# Altium PCB PCB.pcbdoc
Units mm, origin at the board's own origin, x right, y up, seen from the top; angles counter-clockwise.
Board outline 81.6 x 72.96 mm, 4 copper layers (Top Layer, Layer 1, Layer 2, Bottom Layer), stack 0.603 mm thick; 45 components, 81 nets, 314 pads, 97 vias.
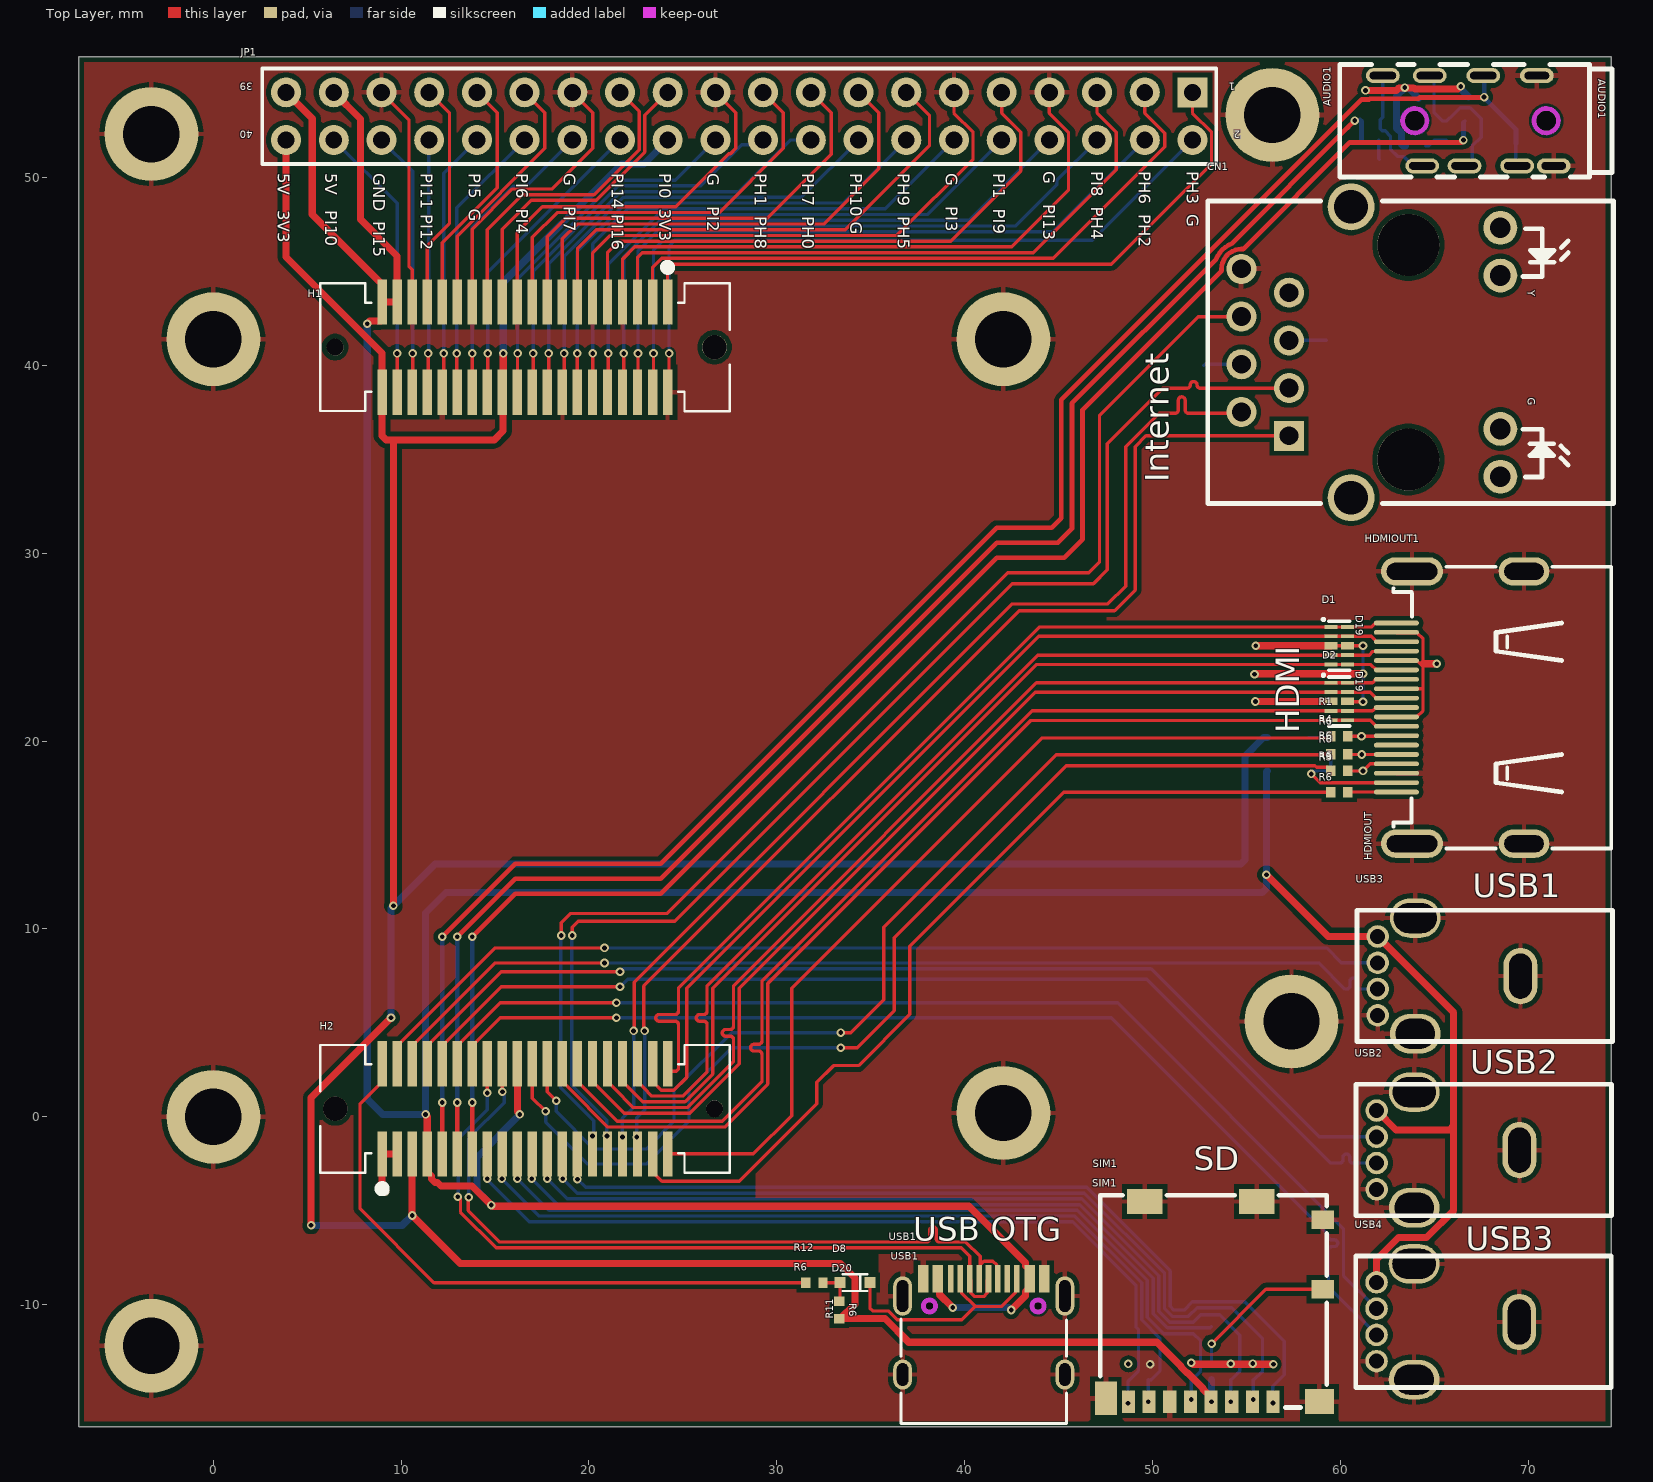
[diagram p0: Top Layer view]
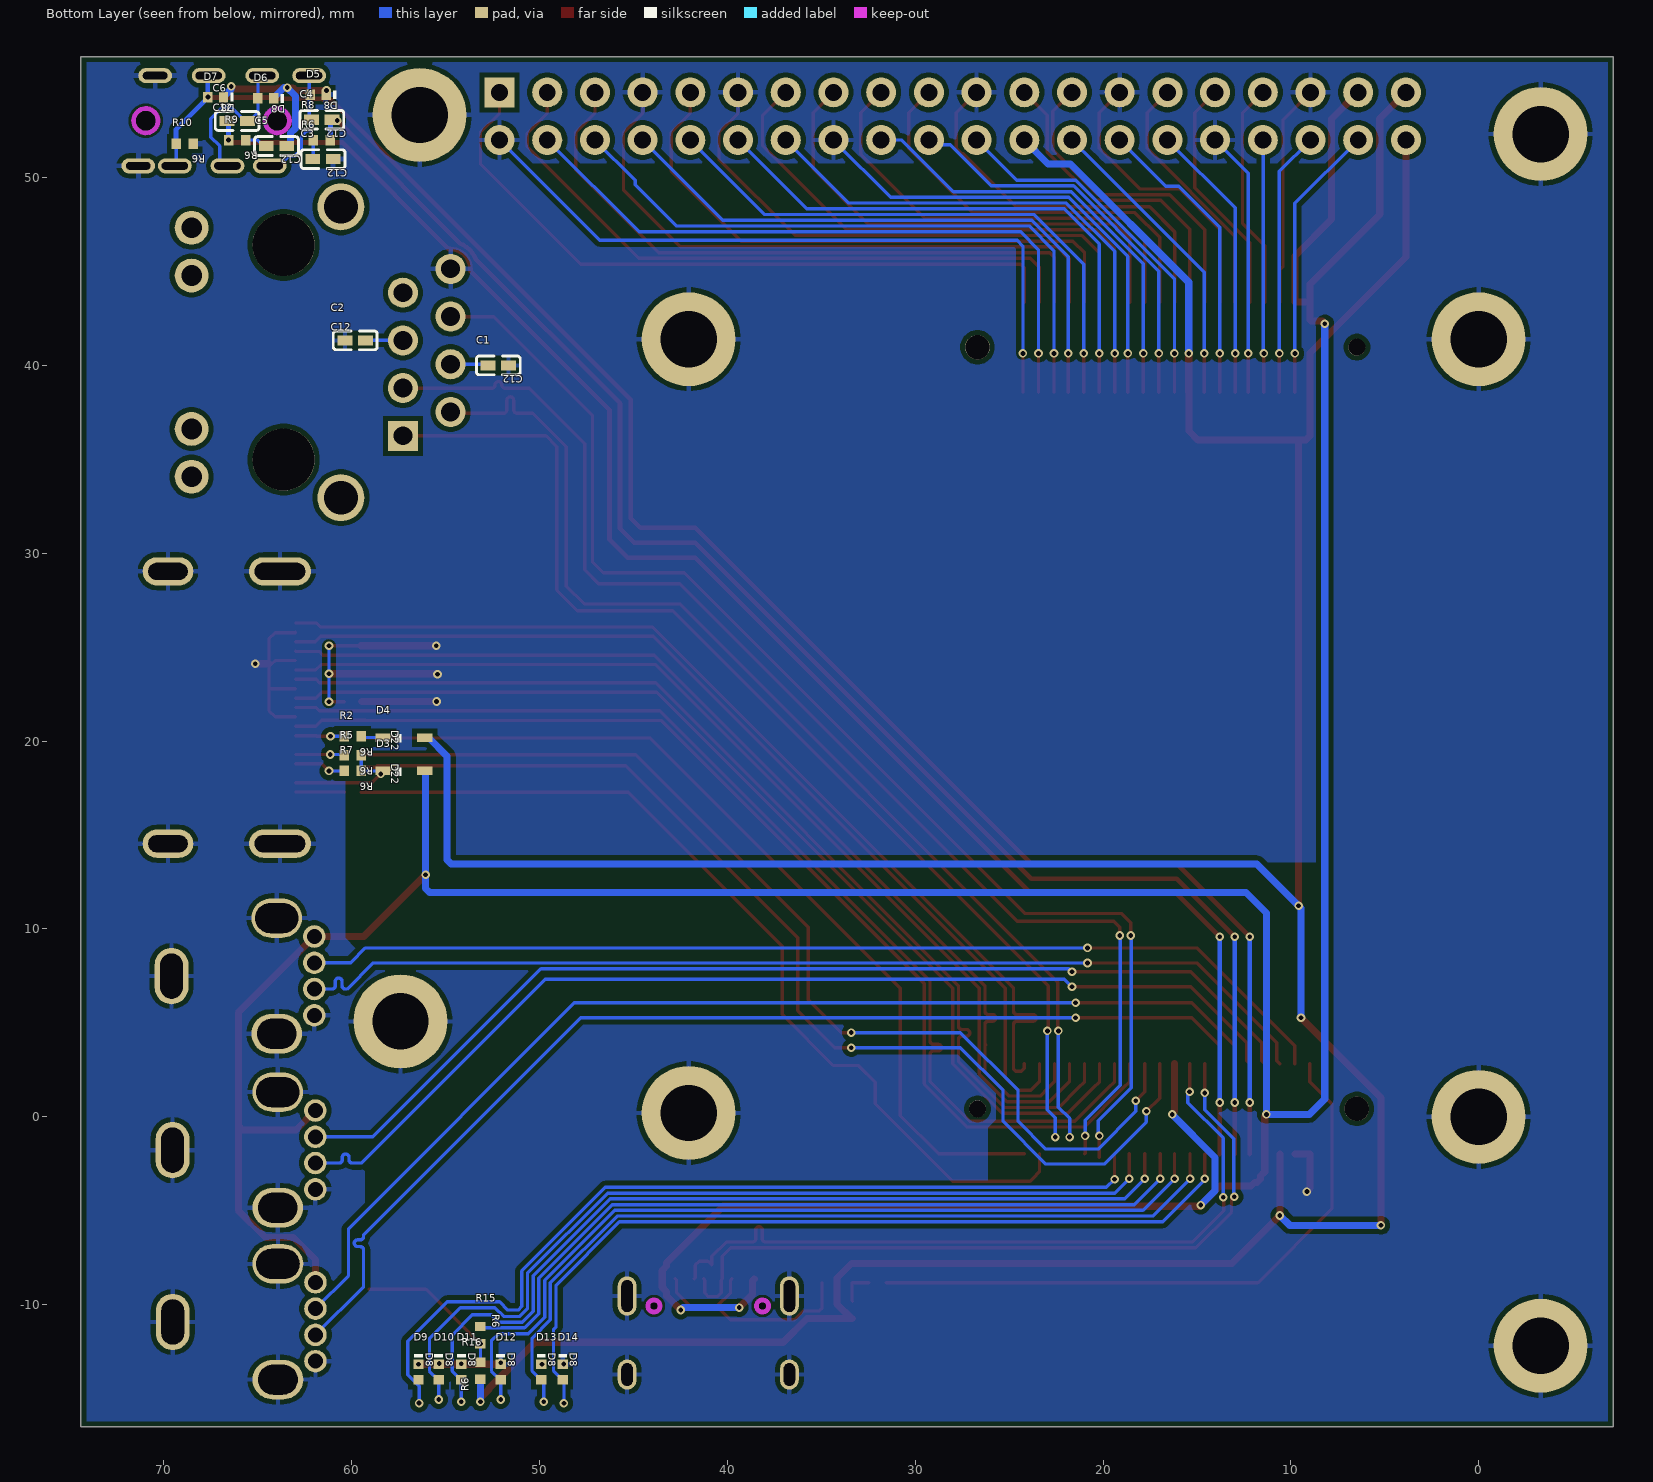
[diagram p1: Bottom Layer view, seen from below]
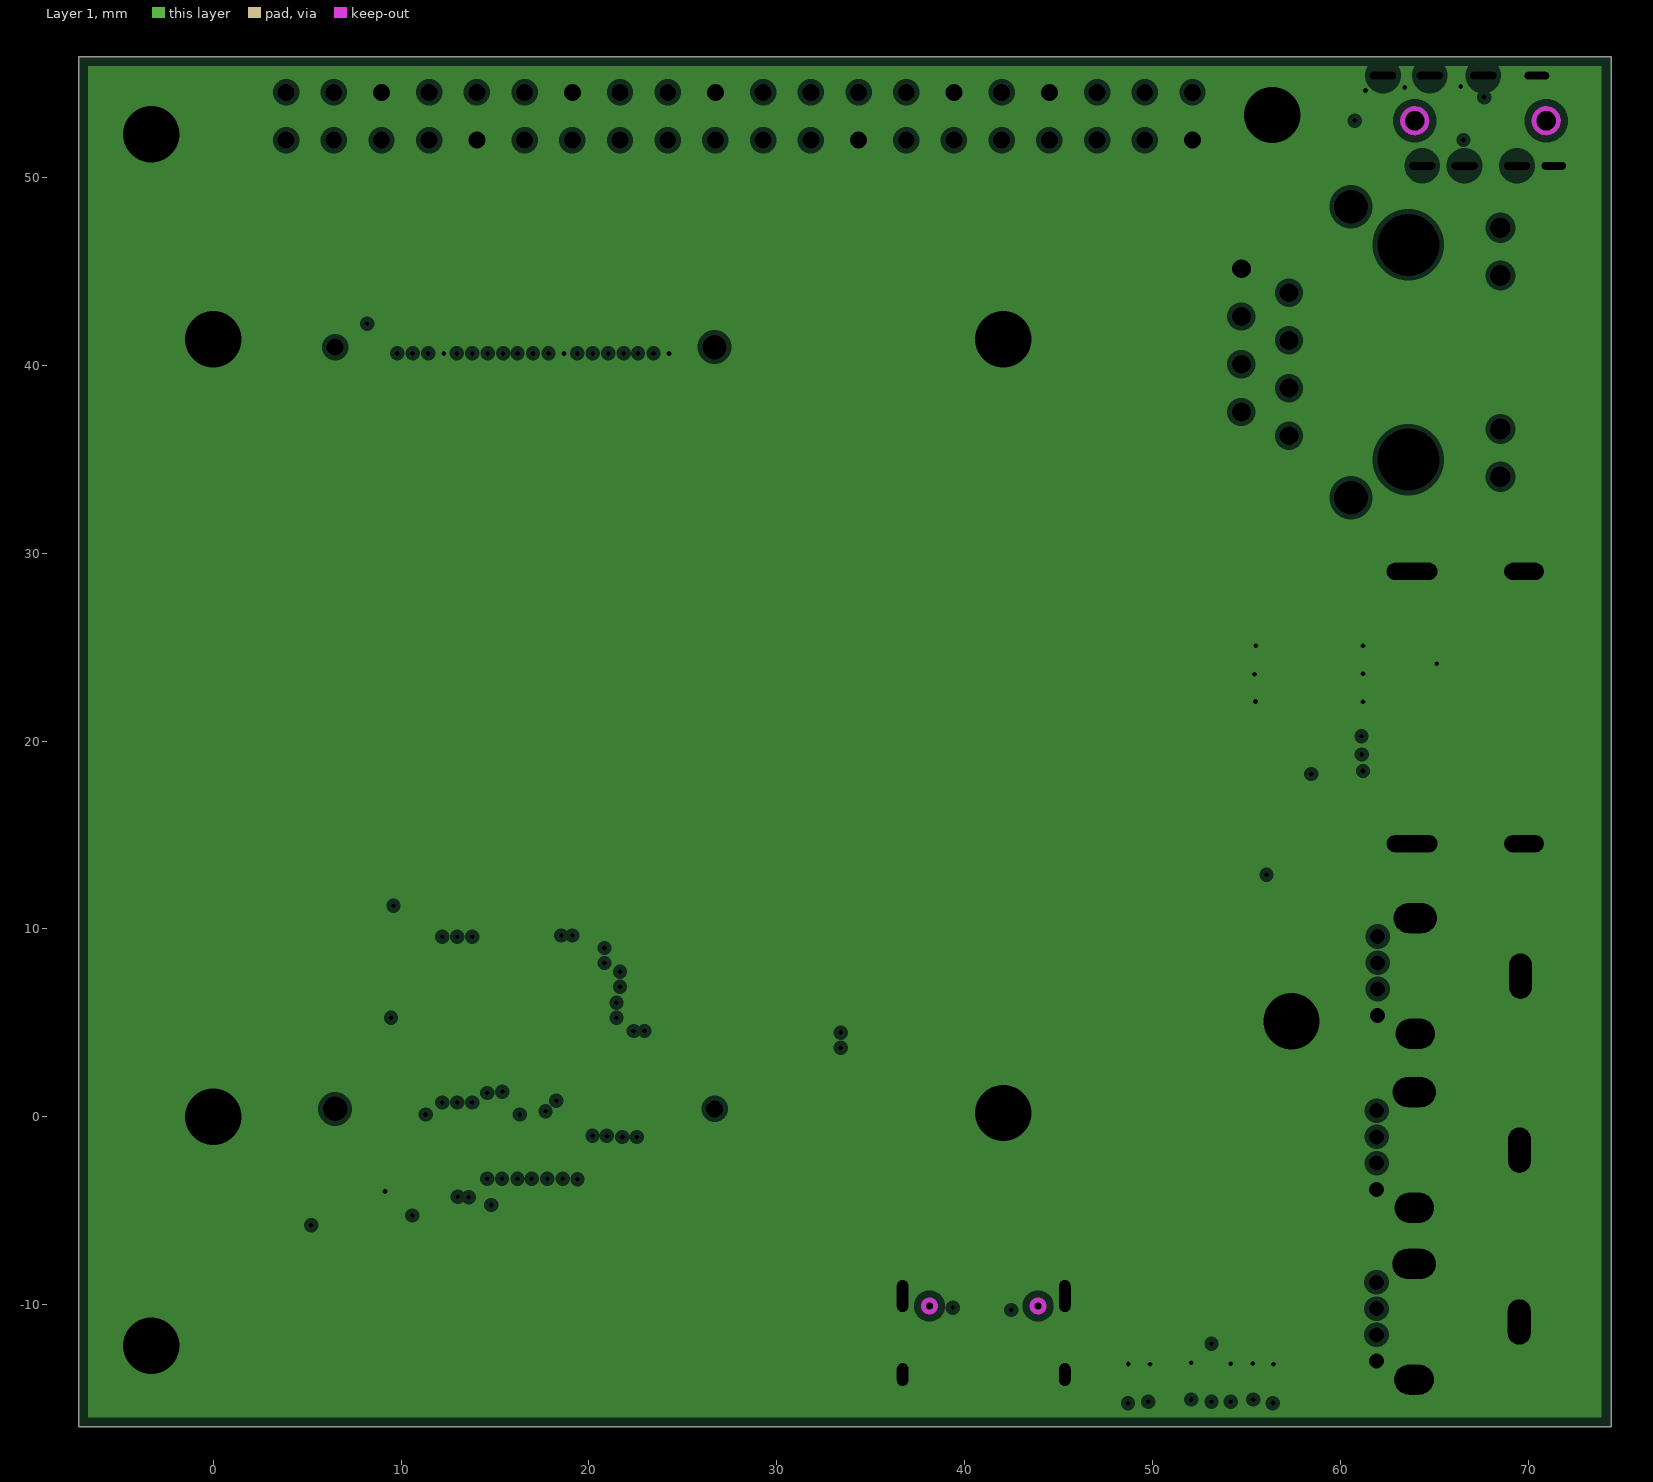
[diagram p2: Layer 1, clearances drawn from the general rule]
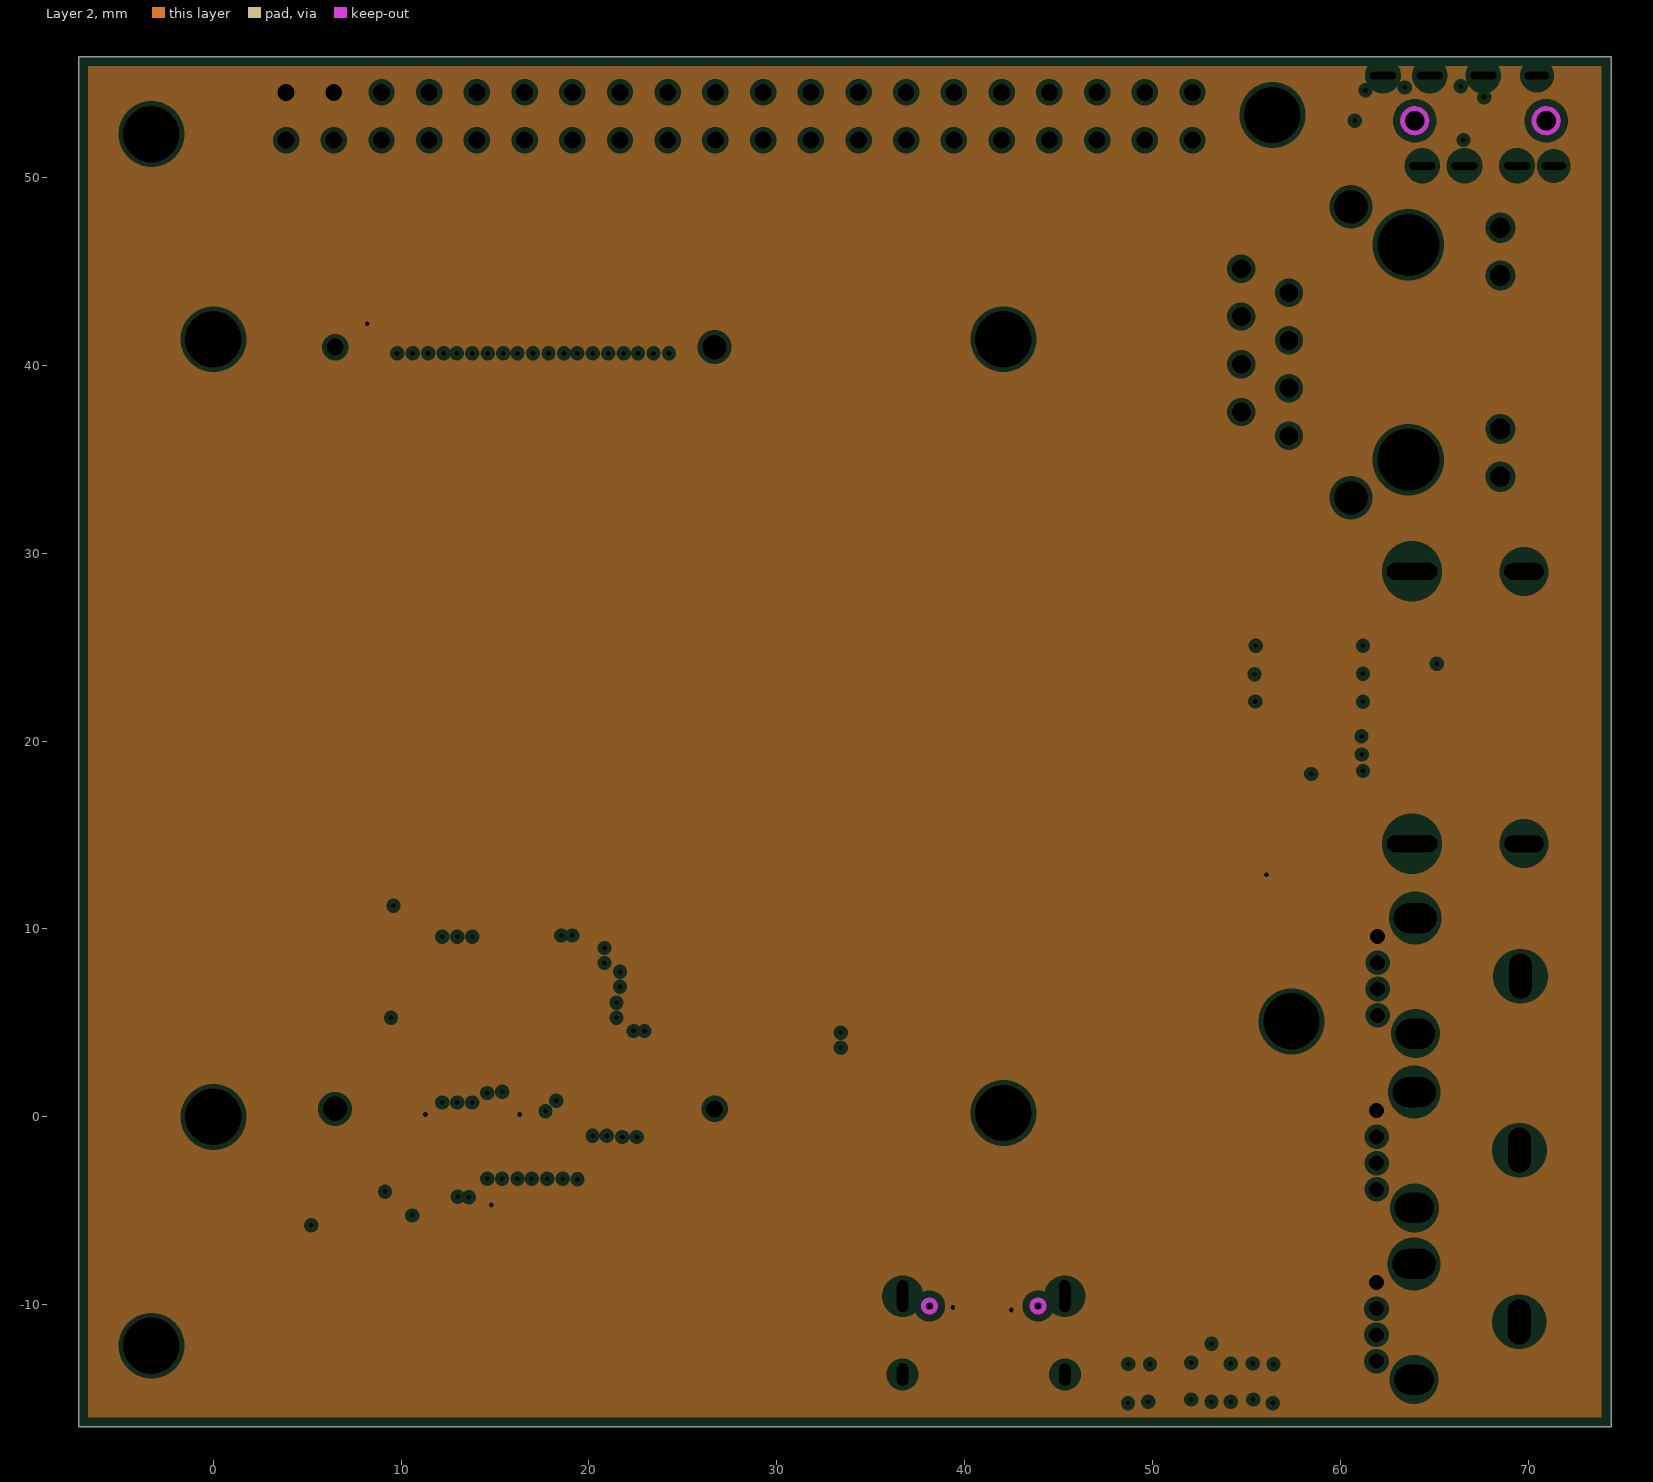
[diagram p3: Layer 2, clearances drawn from the general rule]

## Layer stack, top to bottom
Top Solder Mask Layer: solder mask 0.0102, Solder Resist, Dk 3.5
Top Layer: signal copper 0.0356
Dielectric 1: prepreg 0.0711, PP-006, Dk 4.1
Layer 1: plane copper 0.035, net GND
Dielectric3: dielectric 0.32, FR-4, Dk 4.8
Layer 2: plane copper 0.035, net VBUS
Dielectric 2: prepreg 0.0711, PP-006, Dk 4.1
Bottom Layer: signal copper 0.0356
Bottom Solder Mask Layer: solder mask 0.0102, Solder Resist, Dk 3.5

## Board outline
-7.175,-16.51 -7.175,56.451 74.422,56.451 74.422,-16.51

## Design rules (kind name [scope] priority, off if disabled: settings)
BoardOutlineClearance safeClearance_1 [All] p1: gap=0.254 ignorepadtopadclearanceinfootprint=FALSE except(0: Arc-SplitContinuation Track-SplitContinuation SMDPad-SplitContinuation THPad-SplitContinuation Via-SplitContinuation Fill-SplitContinuation Poly-SplitContinuation Region-SplitContinuation Text-SplitContinuation; 0.089: Track-CutoutEdge SMDPad-OutlineEdge SMDPad-CutoutEdge THPad-OutlineEdge THPad-CutoutEdge Via-CutoutEdge Fill-CutoutEdge Region-CutoutEdge; 0.3: Track-OutlineEdge Via-OutlineEdge Fill-OutlineEdge Poly-OutlineEdge Region-OutlineEdge Text-OutlineEdge)
Clearance poly [InPoly] p1: gap=0.254 ignorepadtopadclearanceinfootprint=FALSE
Clearance [All] p2: gap=0.127 ignorepadtopadclearanceinfootprint=FALSE
DiffPairsRouting differentialPair [All] p1: maxlimit=0.102 minlimit=0.102 mostfreqgap=0.102 toplayer_minwidth=0.102 toplayer_maxwidth=2.54 toplayer_prefwidth=0.254 bottomlayer_minwidth=0.102 bottomlayer_maxwidth=2.54 bottomlayer_prefwidth=0.254 maxuncoupledlength=1.27
PasteMaskExpansion pasteMaskExpansion [All] p1: expansion=0
PlaneClearance [All] p1: clearance=0.254
PlaneConnect innerPlane [All] p1: planeconnectstyle=Relief reliefexpansion=0.254 reliefentries=4 reliefconductorwidth=0.254 reliefairgap=0.254
PolygonConnect copperRegion [All] p1: thpad.connectstyle=Relief thpad.reliefconductorwidth=0.254 thpad.reliefentries=4 thpad.polygonreliefangle="90 Angle" thpad.airgapwidth=0.254 smdpad.connectstyle=Relief smdpad.reliefconductorwidth=0.254 smdpad.reliefentries=4 smdpad.polygonreliefangle="90 Angle" smdpad.airgapwidth=0.254 via.connectstyle=Direct via.reliefconductorwidth=0.254 via.reliefentries=4 via.polygonreliefangle="90 Angle" via.airgapwidth=0.254
PolygonConnect TBCopper [All] p2: connectstyle=Relief reliefconductorwidth=0.152 reliefentries=4 polygonreliefangle="90 Angle" airgapwidth=0.152
PolygonConnect DRAMCopper [All] p3: connectstyle=Relief reliefconductorwidth=0.102 reliefentries=4 polygonreliefangle="90 Angle" airgapwidth=0.102
RoutingVias viaSize [All] p1: holewidth=0.254 width=0.457 viastyle="Through Hole" minholewidth=0.254 minwidth=0.457 maxholewidth=0.254 maxwidth=0.457
SolderMaskExpansion solderMaskExpansion [All] p1: expansion=0.102 istentingtop=FALSE useseparateexpansions=TRUE expansionbottom=0.102 istentingbottom=FALSE
Width Width_tv [InNetClass('TV')] p1: maxlimit=0.254 minlimit=0.254 preferedwidth=0.254
Width Width_pwr [InNetClass('PWR')] p2: maxlimit=0.381 minlimit=0.381 preferedwidth=0.381
Width trackWidth [All] p3: maxlimit=2.54 minlimit=0.102 preferedwidth=0.178
26 further rules are at their usual default settings.

## Classes and differential pairs
net class PHY: EPHY_RXN EPHY_RXP EPHY_TXN EPHY_TXP
net class USB: D0+ D0- D1+ D1- D2+ D2- D3+ D3-
net class TV: LL LR TV_OUT
net class PWR: 3V3 GND VBUS
net class HDMI: HDMI_0N HDMI_0P HDMI_1N HDMI_1P HDMI_2N HDMI_2P HDMI_CN HDMI_CP

## Components (designator, comment, footprint, x,y, rotation, side; value= is the part's Value field where it differs from the comment)
AUDIO1 "PJ-3930-8A" AUDIO-TH_PJ-3930-8A 66.82,53.035 r270 top
C1 "470nF" C0402 52.197,40.005 r0 bottom
C2 "470nF" C0402 59.817,41.338 r180 bottom
C3 "100nF" C0402 61.531,50.99 r0 bottom
C4 "4.7uF" C0402 61.595,53.086 r0 bottom
C5 "100nF" C0402 64.008,51.689 r0 bottom
C6 "4.7uF" C0402 66.103,53.023 r180 bottom
CN1 "HR911105A" RJ8-HR911105A 61.632,40.708 r270 top
D1 "RClamp0524PATCT" SLP2510P8_L2.5-W1.0-P0.50-BL 59.944,25.082 r270 top
D2 "RClamp0524PATCT" SLP2510P8_L2.5-W1.0-P0.50-BL 59.949,22.113 r270 top
D3 "B5819WS" SOD-323_L1.8-W1.3-LS2.5-NSK 57.213,18.415 r180 bottom
D4 "B5819WS" SOD-323_L1.8-W1.3-LS2.5-NSK 57.213,20.193 r180 bottom
D5 "0402ESDA-05N" D0402 61.785,54.419 r0 bottom
D6 "0402ESDA-05N" D0402 64.579,54.229 r0 bottom
D7 "0402ESDA-05N" D0402 67.246,54.292 r0 bottom
D8 "1N5819-SOD523" SOD-523_L1.2-W0.8-LS1.6-FD 34.163,-8.826 r0 top
D9 "0402ESDA-05N" D0402 56.451,-13.589 r270 bottom
D10 "0402ESDA-05N" D0402 55.372,-13.589 r270 bottom
D11 "0402ESDA-05N" D0402 54.165,-13.589 r270 bottom
D12 "0402ESDA-05N" D0402 52.07,-13.589 r270 bottom
D13 "0402ESDA-05N" D0402 49.911,-13.589 r270 bottom
D14 "0402ESDA-05N" D0402 48.768,-13.589 r270 bottom
H1 "BA42-40AT-0-NHB" CONN-SMD_40P-P0.80_10144517-042802LF 16.586,41.402 r0 top
H2 "BA42-40AT-0-NHB" CONN-SMD_40P-P0.80_10144517-042802LF 16.586,0 r180 top
HDMIOUT1 "HDMI-019S" HDMI-SMD_HDMI-019S 66.389,21.792 r90 top
JP1 "Header 2X11" HDR2.54-LI-2x20P 28.003,53.276 r180 top
R1 "100" R0402-NSK_2 59.944,20.256 r0 top
R2 "27K" R0402-NSK_2 59.944,20.256 r0 bottom
R3 "1k" R0402-NSK_2 59.944,17.272 r0 top
R4 "100" R0402-NSK_2 59.944,19.304 r0 top
R5 "10K" R0402-NSK_2 59.944,19.241 r0 bottom
R6 "100" R0402-NSK_2 59.944,18.415 r0 top
R7 "10K" R0402-NSK_2 59.944,18.415 r0 bottom
R8 "22" R0402-NSK_2 61.595,52.006 r180 bottom
R9 "22" R0402-NSK_2 66.103,52.006 r0 bottom
R10 "75" R0402-NSK_2 68.897,51.816 r0 bottom
R11 "47k" R0402-NSK_2 33.337,-10.287 r270 top
R12 "1K" R0402-NSK_2 32.004,-8.826 r0 top
R15 "1K" R0402-NSK_2 53.149,-11.62 r270 bottom
R16 "47K" R0402-NSK_2 53.149,-13.525 r90 bottom
SIM1 "SIM-SMD_8P-1040310811" SIM-SMD_8P-1040310811 53.29,-9.846 r0 top
USB1 "USB-C-SMD_TYPEC-304-BCP16" USB-C-SMD_TYPEC-304-BCP16-1 41.021,-11.176 r0 top
USB2 "" USB-A-TH_4P-P1.40-V-F-C39416 67.627,-1.714 r90 top
USB3 "" USB-A-TH_4P-P1.40-V-F-C39416 67.681,7.553 r90 top
USB4 "" USB-A-TH_4P-P1.40-V-F-C39416 67.617,-10.862 r90 top

## Footprints (in the part's own frame and the unit in brackets; to place one, negate y for a bottom-side part, rotate by r counter-clockwise, add the part's x,y. Pads: shape width x height; smd on the part's side, far side on the other; paste and mask are expansions set on the pad)
AUDIO-TH_PJ-3930-8A [mil]
  oval 31.5x70.9 hole 15.7 slot 51.2 at 90 deg paste+0 mask+2: 1(-94.5,143.7) 8(94.5,179.1)
  oval 31.5x70.9 hole 15.7 slot 55.1 at 90 deg paste+0 mask+2: 2(94.5,-96.5) 3(-94.5,-80.7) 4(-94.5,31.5) 5(-94.5,-179.1) 6(94.5,-7.9) 7(94.5,102.4)
  Board Outline Layer board cut-out: -25.6,163.3 -25.6,159.93 -23.86,153.42 -20.49,147.58 -15.72,142.81 -9.88,139.44 -3.37,137.7 3.37,137.7 9.88,139.44 15.72,142.81 20.48,147.58 23.86,153.42 25.6,159.93 25.6,163.3 25.6,166.67 23.86,173.18 20.48,179.02 15.72,183.78 9.88,187.16 3.37,188.9 -3.37,188.9 -9.88,187.16 -15.72,183.78 -20.49,179.02 -23.86,173.18 -25.6,166.67 -25.6,163.3
  Board Outline Layer board cut-out: -25.6,-112.2 -25.6,-115.57 -23.86,-122.08 -20.49,-127.92 -15.72,-132.69 -9.88,-136.06 -3.37,-137.8 3.37,-137.8 9.88,-136.06 15.72,-132.69 20.48,-127.92 23.86,-122.08 25.6,-115.57 25.6,-112.2 25.6,-108.83 23.86,-102.32 20.48,-96.48 15.72,-91.72 9.88,-88.34 3.37,-86.6 -3.37,-86.6 -9.88,-88.34 -15.72,-91.72 -20.49,-96.48 -23.86,-102.32 -25.6,-108.83 -25.6,-112.2
  Board Outline Layer circle w0.2: c0,163.3 r25.6
  Board Outline Layer circle w10: c0,163.3 r25.6
  Board Outline Layer circle w0.2: c0,-112.2 r25.6
  Board Outline Layer circle w10: c0,-112.2 r25.6
  silkscreen extent -118,-270 118,301
C0402 [mm]
  rect 0.79x0.54 smd paste-100 mask+0.051: 1(-0.545,0) 2(0.545,0)
  silkscreen extent -1.17,-0.5 1.17,0.5
CONN-SMD_40P-P0.80_10144517-042802LF [mm]
  rect 0.5x2.4 smd paste+0 mask+0.051: 1(7.6,1.975) 2(7.6,-2.825) 3(6.8,1.975) 4(6.8,-2.825) 5(6,1.975) 6(6,-2.825) 7(5.2,1.975) 8(5.2,-2.825) 9(4.4,1.975) 10(4.4,-2.825) 11(3.6,1.975) 12(3.6,-2.825) 13(2.8,1.975) 14(2.8,-2.825) 15(2,1.975) 16(2,-2.825) 17(1.2,1.975) 18(1.2,-2.825) 19(0.4,1.975) 20(0.4,-2.825) 21(-0.4,1.975) 22(-0.4,-2.825) 23(-1.2,1.975) 24(-1.2,-2.825) 25(-2,1.975) 26(-2,-2.825) 27(-2.8,1.975) 28(-2.8,-2.825) 29(-3.6,1.975) 30(-3.6,-2.825) 31(-4.4,1.975) 32(-4.4,-2.825) 33(-5.2,1.975) 34(-5.2,-2.825) 35(-6,1.975) 36(-6,-2.825) 37(-6.8,1.975) 38(-6.8,-2.825) 39(-7.6,1.975) 40(-7.6,-2.825)
  round 0.9 hole 0.9 unplated paste+0: ""(-10.1,-0.425)
  round 1.3 hole 1.3 unplated paste+0: ""(10.1,-0.425)
  silkscreen extent -10.9,-3.83 10.9,4.02
D0402 [mm]
  rect 0.505x0.551 smd paste-100 mask+0.051: 1(-0.417,0) 2(0.417,0)
  silkscreen extent -0.95,-0.22 -0.8,0.22
HDMI-SMD_HDMI-019S [mm]
  oval 0.25x2.4 smd paste-100 mask+0.051: 1(4.501,3.396) 2(4.001,3.396) 3(3.501,3.396) 4(3.001,3.396) 5(2.5,3.396) 6(2,3.396) 7(1.5,3.396) 8(1,3.396) 9(0.5,3.396) 10(0,3.396) 11(-0.5,3.396) 12(-1,3.396) 13(-1.5,3.396) 14(-2,3.396) 15(-2.5,3.396) 16(-3.001,3.396) 17(-3.501,3.396) 18(-4.001,3.396) 19(-4.501,3.396)
  oval 1.5x2.7 hole 0.9 slot 2.1 at 90 deg copper offset -0.001,0.001 paste+0 mask+0.051: 20(7.251,-3.397)
  oval 1.5x2.7 hole 0.9 slot 2.1 at 90 deg copper offset 0.001,0.001 paste+0 mask+0.051: 21(-7.251,-3.397)
  oval 1.5x3.3 hole 0.9 slot 2.7 at 90 deg copper offset -0.001,0.001 paste+0 mask+0.051: 22(7.251,2.563)
  oval 1.5x3.3 hole 0.9 slot 2.7 at 90 deg copper offset 0.001,0.001 paste+0 mask+0.051: 23(-7.251,2.563)
  silkscreen extent -7.5,-8.04 7.5,3.56
HDR2.54-LI-2x20P [mm]
  rect 1.6x1.6 hole 0.9: 1(-24.13,-1.27)
  round 1.6 hole 0.9: 2(-24.13,1.27) 3(-21.59,-1.27) 4(-21.59,1.27) 5(-19.05,-1.27) 6(-19.05,1.27) 7(-16.51,-1.27) 8(-16.51,1.27) 9(-13.97,-1.27) 10(-13.97,1.27) 11(-11.43,-1.27) 12(-11.43,1.27) 13(-8.89,-1.27) 14(-8.89,1.27) 15(-6.35,-1.27) 16(-6.35,1.27) 17(-3.81,-1.27) 18(-3.81,1.27) 19(-1.27,-1.27) 20(-1.27,1.27) 21(1.27,-1.27) 22(1.27,1.27) 23(3.81,-1.27) 24(3.81,1.27) 25(6.35,-1.27) 26(6.35,1.27) 27(8.89,-1.27) 28(8.89,1.27) 29(11.43,-1.27) 30(11.43,1.27) 31(13.97,-1.27) 32(13.97,1.27) 33(16.51,-1.27) 34(16.51,1.27) 35(19.05,-1.27) 36(19.05,1.27) 37(21.59,-1.27) 38(21.59,1.27) 39(24.13,-1.27) 40(24.13,1.27)
  silkscreen extent -25.4,-2.54 25.4,2.54, body extent -25.4,-2.54 25.4,2.54, height 8.5
R0402-NSK_2 [mm]
  rect 0.5x0.559 smd paste+0 mask+0.051: 1(-0.457,0) 2(0.457,0)
RJ8-HR911105A [mm]
  round 3.3 hole 3.3 unplated: 0(-5.715,1.995) 0(5.715,1.995)
  rect 1.6x1.6 hole 1: 1(4.45,-4.355)
  round 1.6 hole 1: 2(3.18,-6.895) 3(1.91,-4.355) 4(0.64,-6.895) 5(-0.63,-4.355) 6(-1.9,-6.895) 7(-3.17,-4.355) 8(-4.44,-6.895)
  round 1.8 hole 1.1: 9(6.625,6.895) 10(4.085,6.895) 11(-4.085,6.895) 12(-6.625,6.895)
  round 2.5 hole 1.8: 13(-7.745,-1.055) 14(7.745,-1.055)
  silkscreen extent -8.05,-8.68 8.05,12.91, body extent -8,-8.58 7.88,12.82, height 1.5
SIM-SMD_8P-1040310811 [mm]
  rect 0.7x1.2 smd paste+0 mask+0.051: 1(3.138,-5.337) 2(2.037,-5.337) 3(0.938,-5.337) 4(-0.162,-5.337) 5(-1.263,-5.337) 6(-2.363,-5.337) 7(-3.462,-5.337) 8(-4.562,-5.337)
  rect 1.17x1.8 smd paste+0 mask+0.051: 9(-5.773,-5.138)
  rect 1.55x1.35 smd paste+0 mask+0.051: 10(5.598,-5.313)
  rect 1.2x1 smd paste+0 mask+0.051: 11(5.773,0.663) 12(5.773,4.363)
  rect 1.9x1.35 smd paste+0 mask+0.051: 13(2.273,5.337) 14(-3.697,5.337)
  silkscreen extent -6.07,-5.64 5.99,5.67
SLP2510P8_L2.5-W1.0-P0.50-BL [mm]
  rect 0.201x0.681 smd paste+0 mask+0.051: 1(-1.001,-0.439) 2(-0.5,-0.439) 4(0.5,-0.439) 5(1.001,-0.439) 6(1.001,0.439) 7(0.5,0.439) 9(-0.5,0.439) 10(-1.001,0.439)
  rect 0.399x0.681 smd paste+0 mask+0.051: 3(0,-0.439) 8(0,0.439)
  silkscreen extent -1.44,-0.88 1.3,0.55
SOD-323_L1.8-W1.3-LS2.5-NSK [mm]
  rect 0.846x0.455 smd paste+0 mask+0.051: 1(-1.097,0) 2(1.097,0)
  silkscreen extent -0.47,-0.25 -0.17,0.17
SOD-523_L1.2-W0.8-LS1.6-FD [mil]
  rect 23.6x23.6 smd paste+0 mask+2: 1(-31.5,0) 2(31.5,0)
  silkscreen extent -26,-18 26,18
USB-A-TH_4P-P1.40-V-F-C39416 [mm]
  round 1.2 hole 0.8 paste+0 mask+0.051: 1(2.048,5.685) 2(0.648,5.685) 3(-0.749,5.685) 4(-2.148,5.685)
  oval 2.1x2.7 hole 1.6 slot 2.1 at 90 deg paste+0 mask+0.051: 5(-3.13,3.685)
  oval 2.1x2.7 hole 1.6 slot 2.3 at 90 deg paste+0 mask+0.051: 6(3.03,3.685)
  oval 3x1.8 hole 1.2 slot 2.4 at 0 deg paste+0 mask+0.051: 7(-0.06,-1.915)
  silkscreen extent -3.55,-6.82 3.45,6.78
USB-C-SMD_TYPEC-304-BCP16-1 [mil]
  oval 39.4x82.7 hole 23.6 slot 66.9 at 90 deg paste+0 mask+1.97: 12(-170.1,64.3) 13(170.1,64.3)
  oval 39.4x63 hole 23.6 slot 47.2 at 90 deg paste+0 mask+1.97: 14(-170.1,-100.3) 15(170.1,-100.3)
  rect 21.7x57.1 smd paste-3937.01 mask+1.97: A1B12(-127,100.3) A4B9(-96.5,100.3) B1A12(127,100.3) B4A9(96.5,100.3)
  rect 11.8x57.1 smd paste-3937.01 mask+1.97: A5(-49.2,100.3) A6(-9.8,100.3) A7(9.8,100.3) A8(49.2,100.3) B5(68.9,100.3) B6(29.5,100.3) B7(-29.5,100.3) B8(-68.9,100.3)
  Board Outline Layer board cut-out: -101,43.4 -101,45.95 -102.95,50.65 -106.55,54.25 -111.25,56.2 -116.35,56.2 -121.05,54.25 -124.65,50.65 -126.6,45.95 -126.6,43.4 -126.6,40.85 -124.65,36.15 -121.05,32.55 -116.35,30.6 -111.25,30.6 -106.55,32.55 -102.95,36.15 -101,40.85 -101,43.4
  Board Outline Layer board cut-out: 126.6,43.4 126.6,45.95 124.65,50.65 121.05,54.25 116.35,56.2 111.25,56.2 106.55,54.25 102.95,50.65 101,45.95 101,43.4 101,40.85 102.95,36.15 106.55,32.55 111.25,30.6 116.35,30.6 121.05,32.55 124.65,36.15 126.6,40.85 126.6,43.4
  Board Outline Layer circle w0.2: c-113.8,43.4 r12.8
  Board Outline Layer circle w10: c-113.8,43.4 r12.8
  Board Outline Layer circle w0.2: c113.8,43.4 r12.8
  Board Outline Layer circle w10: c113.8,43.4 r12.8
  silkscreen extent -173,-203 173,16

## Part data
C1 C2 C3 C4 C5 C6: library part CAP_0402
CN1: "带灯以太网接口"
JP1: library part "Header 20X2", "20*2P接插件"
R1 R2 R3 R4 R5 R6 R7 R8 R9 R10 R11 R12 R15 R16: library part Res_0402
SIM1: library part 1040310811
USB1: library part TYPEC-304-BCP16
USB2 USB3 USB4: library part "AFSide of the three straight feet boundless copper14.0PBTWhite plastic90degree"

## Free pads (board coordinates)
  round 5 hole 3: 1(-3.302,-12.192) 1(-3.302,52.324) 1(0,0) 1(0,41.402) 1(42.062,0.203) 1(42.062,41.402) 1(56.388,53.34) 1(57.404,5.08)

## Via types
v1: diameter 0.457, hole 0.254, Top Layer to Bottom Layer, tented both sides, 97 vias

## Nets (pads, with @x,y where several pads share a name; then routed paths per layer and width w, separated by ;. In a path a pad name is that pad's centre, name@x,y a point inside that pad or via, vN(x,y) a via of type N, cw(c..) or ccw(c..) an arc to the next point about the centre after c; other vN are vias at no path point)
3V3: D4.2 H1.24 H1.40 H2.5 JP1.24 JP1.40 R11.2 R16.1 SIM1.4 | length 200.9
  Top Layer w0.381: JP1.40 3.873,45.773 8.986,40.661 H1.40 8.986,36.259 9.209,36.035 9.588,36.035 ; v1(5.207,-5.779) 5.207,1.016 v1(9.461,5.271) ; v1(9.588,11.239) 9.588,36.035 ; H2.5 v1(10.586,-5.252) 13.144,-7.81 33.395,-7.81 34.163,-8.578 34.163,-9.983 33.73,-10.415 33.696,-10.415 R11.2@33.367,-10.744 ; v1(15.437,40.647) 15.437,38.577 15.43,38.57 15.43,36.512 14.953,36.035 9.588,36.035 ; R11.2 R11.2@33.367,-10.744 ; v1(53.149,-15.176) 53.149,-14.955 52.698,-14.504 52.698,-14.456 51.878,-13.635 51.844,-13.635 51.524,-13.315 51.524,-13.281 50.244,-12.002 37.022,-12.002 35.764,-10.744 R11.2@33.367,-10.744
  Bottom Layer w0.381: v1(5.207,-5.779) 10.06,-5.779 v1(10.586,-5.252) ; v1(9.461,5.271) 9.461,11.112 v1(9.588,11.239) 11.811,13.462 54.704,13.462 54.927,13.685 54.927,19.2 55.921,20.193 D4.2 ; v1(15.437,40.647) 15.437,44.44 21.734,50.736 22.924,50.736 JP1.24 ; v1(53.149,-15.176) R16.1@53.149,-13.993
D0+: H2.18 USB1.A6 USB1.B6 | length 40.4
  Top Layer w0.178: v1(13.603,-4.279) 13.576,-4.306 13.576,-4.991 15.253,-6.667 37.274,-6.667 37.96,-6.667 ccw(c37.96,-6.49) 38.138,-6.49 38.138,-6.031 cw(c38.316,-6.031) 38.494,-6.031 38.494,-6.49 ccw(c38.671,-6.49) 38.671,-6.667 39.116,-6.667 40.069,-6.667 40.833,-7.432 40.833,-7.885 41.031,-7.687 41.509,-7.687 41.709,-7.887 41.709,-8.567 USB1.B6 ; H2.18 15.389,2.823 v1(15.391,1.332) v1(15.391,1.332)
  Bottom Layer w0.178: v1(13.603,-4.279) 13.606,-4.276 13.606,-1.126 15.481,0.749 v1@15.481,1.27
D0-: H2.16 USB1.A7 USB1.B7 | length 40.5
  Top Layer w0.178: v1(13.02,-4.253) 13.048,-4.253 13.157,-4.362 13.157,-5.07 15.059,-6.972 39.814,-6.972 40.272,-7.429 USB1.B7 40.333,-8.689 40.333,-9.369 40.533,-9.569 41.011,-9.569 41.209,-9.372 41.209,-8.689 USB1.A7 ; v1(14.586,1.27) H2.16
  Bottom Layer w0.178: v1(13.02,-4.253) 13.049,-4.224 13.049,-1.162 14.586,0.375 v1(14.586,1.27)
D1+: H2.10 USB2.3 | length 56.9
  Top Layer w0.178: H2.10 12.347,2.986 12.347,3.941 15.328,6.921 v1(21.653,6.921)
  Bottom Layer w0.178: v1(21.653,6.921) 22.06,7.328 49.695,7.328 59.486,-2.463 59.88,-2.463 59.969,-2.463 ccw(c59.969,-2.285) 60.147,-2.285 60.147,-2.158 cw(c60.325,-2.158) 60.503,-2.158 60.503,-2.285 ccw(c60.681,-2.285) 60.681,-2.463 61.277,-2.463 USB2.3
D1-: H2.8 USB2.2 | length 56.9
  Top Layer w0.178: H2.8 11.548,2.986 11.548,3.942 15.327,7.721 v1(21.653,7.721)
  Bottom Layer w0.178: v1(21.653,7.721) 21.819,7.887 49.926,7.887 58.879,-1.066 USB2.2
D2+: H2.6 USB3.3 | length 55.6
  Top Layer w0.178: H2.6 10.747,2.986 10.747,3.941 14.998,8.191 v1(20.828,8.191)
  Bottom Layer w0.178: v1(20.828,8.191) 58.864,8.191 60.251,6.805 60.34,6.805 ccw(c60.34,6.982) 60.518,6.982 60.518,7.209 cw(c60.696,7.209) 60.874,7.209 60.874,6.982 ccw(c61.051,6.982) 61.051,6.805 USB3.3
D2-: H2.4 USB3.2 | length 55.7
  Top Layer w0.178: H2.4 9.786,3.775 9.97,3.958 9.97,3.963 14.998,8.992 v1(20.828,8.992)
  Bottom Layer w0.178: v1(20.828,8.992) 59.271,8.992 60.061,8.202 USB3.2
D3+: H2.14 USB4.3 | length 59
  Top Layer w0.178: H2.14 13.786,3.78 15.277,5.271 v1(21.463,5.271)
  Bottom Layer w0.178: v1(21.463,5.271) 47.816,5.271 59.372,-6.286 59.372,-6.375 ccw(c59.55,-6.375) 59.55,-6.553 59.69,-6.553 cw(c59.69,-6.731) 59.69,-6.909 59.55,-6.909 ccw(c59.55,-7.087) 59.372,-7.087 59.372,-8.255 59.372,-9.05 USB4.3
D3-: H2.12 USB4.2 | length 59.1
  Top Layer w0.178: H2.12 12.986,3.78 15.276,6.07 v1(21.463,6.07)
  Bottom Layer w0.178: v1(21.463,6.07) 48.147,6.07 60.172,-5.955 60.172,-8.453 USB4.2
EPHY_RXN: CN1.6 H2.29 | length 67.4
  Top Layer w0.178: v1(18.529,9.652) 18.529,10.338 19.018,10.827 24.161,10.827 42.303,28.969 46.622,28.969 47.18,29.527 47.18,37.338 52.446,42.604 CN1.6@54.737,42.604 ; H2.29@20.193,-2.159 v1(20.193,-1.016)
  Bottom Layer w0.178: v1(18.529,9.652) 18.504,9.627 18.504,1.542 20.246,-0.2 20.246,-0.963 v1(20.193,-1.016)
EPHY_RXP: CN1.3 H2.31 | length 67.3
  Top Layer w0.178: v1(19.113,9.652) 19.113,10.096 19.431,10.414 24.575,10.414 42.545,28.384 46.864,28.384 47.594,29.114 47.594,35.845 50.542,38.794 51.752,38.794 51.841,38.794 ccw(c51.841,38.971) 52.019,38.971 cw(c52.197,38.971) 52.375,38.971 ccw(c52.553,38.971) 52.553,38.794 53.467,38.794 CN1.3@57.277,38.794 ; v1(20.955,-1.016) 20.955,-1.944 H2.31
  Bottom Layer w0.178: v1(19.113,9.652) 19.088,9.627 19.088,1.676 20.955,-0.191 v1(20.955,-1.016)
EPHY_TXN: CN1.2 H2.33 | length 59.2
  Top Layer w0.178: v1(22.377,4.572) 22.415,4.61 22.415,7.175 42.545,27.305 47.625,27.305 48.578,28.258 48.578,35.687 50.355,37.465 51.117,37.465 51.206,37.465 ccw(c51.206,37.643) 51.384,37.643 51.384,38.157 cw(c51.562,38.157) 51.74,38.157 51.74,37.643 ccw(c51.918,37.643) 51.918,37.465 53.086,37.465 54.673,37.465 CN1.2
  Bottom Layer w0.178: v1(21.78,-1.079) 21.78,-0.086 22.377,0.511 v1(22.377,4.572)
EPHY_TXP: CN1.1 H2.35 | length 59.2
  Top Layer w0.178: v1(22.962,4.572) 22.924,4.61 22.924,6.965 42.904,26.946 47.984,26.946 49.085,28.047 49.085,35.687 49.657,36.258 CN1.1
  Bottom Layer w0.178: v1(22.543,-1.079) 22.543,-0.043 22.962,0.377 v1(22.962,4.572)
GND: AUDIO1.1 AUDIO1.8 C1.1 C2.1 C3.1 C5.1 CN1.8 D1.3 D1.8 D2.3 D2.8 D5.1 D6.1 D7.1 D9.1 D10.1 D11.1 D12.1 D13.1 D14.1 H1.2 H1.7 H1.11 H1.16 H1.21 H1.27 H1.32 H1.35 H2.1 H2.3 HDMIOUT1.2 HDMIOUT1.5 HDMIOUT1.8 HDMIOUT1.11 HDMIOUT1.17 HDMIOUT1.20 HDMIOUT1.21 HDMIOUT1.22 HDMIOUT1.23 JP1.2 JP1.7 JP1.11 JP1.16 JP1.21 JP1.27 JP1.32 JP1.35 pad.1 R10.1 SIM1.6 SIM1.9 SIM1.10 SIM1.12 SIM1.13 SIM1.14 USB1.12 USB1.13 USB1.14 USB1.15 USB1.A1B12 USB1.B1A12 USB2.4 USB2.5 USB2.6 USB2.7 USB3.4 USB3.5 USB3.6 USB3.7 USB4.4 USB4.5 USB4.6 USB4.7 | length 235.8
  Top Layer w0.178: JP1.35 10.414,53.086 10.414,45.275 10.586,45.103 H1.35 ; H1.32@12.262,38.577 v1(12.262,40.647) ; H1.27 13.786,47.261 15.928,49.403 18.037,49.403 20.193,51.559 20.193,53.467 JP1.27 ; H1.21 16.186,47.11 17.526,48.45 24.614,48.45 27.446,51.283 27.536,51.283 27.813,51.559 27.813,53.467 JP1.21 ; H1.16@18.676,38.577 v1(18.676,40.647) ; H1.11 20.186,45.967 21.145,46.926 36.386,46.926 40.449,50.99 40.449,52.427 39.433,53.443 JP1.11 ; H1.7 21.786,45.662 22.441,46.317 42.507,46.317 45.529,49.339 45.529,52.427 44.514,53.443 JP1.7 ; H1.2@24.264,38.577 v1(24.264,40.647) ; D1.3 D1.8 v1(61.214,25.082) ; D2.8@60.383,22.098 v1(61.214,22.098) ; HDMIOUT1.11 64.068,21.292 64.409,21.633 64.409,22.796 ; HDMIOUT1.8 64.405,22.793 64.409,22.796 ; HDMIOUT1.5 64.088,24.293 64.256,24.124 64.409,24.124 ; HDMIOUT1.2 63.005,25.781 64.08,25.781 64.409,25.452 64.409,24.124 ; 64.409,22.796 64.409,24.124
  Top Layer w0.381: v1@8.986,-3.825 v1(9.144,-3.983) 9.144,-3.962 8.986,-3.804 H2.1 H2.3 ; v1(48.718,-13.158) v1@48.735,-13.158 ; v1(52.07,-13.089) 52.154,-13.172 v1@55.32,-13.172 ; v1@55.32,-13.138 v1(55.337,-13.138) ; v1@55.337,-13.172 v1(56.443,-13.172) ; v1(55.435,23.558) 55.463,23.586 61.21,23.586 v1(61.214,23.59) ; v1(55.484,22.113) D2.3@59.489,22.113 ; v1(55.499,25.082) D1.3 ; v1(61.344,54.65) 63,54.65 63.136,54.786 63.422,54.786 v1(63.436,54.8) 63.451,54.786 63.904,54.786 63.972,54.718 66.275,54.718 v1(66.421,54.864) ; 64.409,24.124 v1(65.145,24.124)
  Bottom Layer w0.178: v1(12.262,40.647) 12.262,50.235 JP1.32 ; v1(18.676,40.647) 18.676,45.81 21.821,48.956 31.303,48.956 JP1.16 ; v1(24.264,40.647) 24.264,46.362 24.575,46.672 46.799,46.672 JP1.2 ; v1(61.214,22.098) v1(61.214,23.59) v1(61.214,25.082)
  Bottom Layer w0.381: D14.1@48.704,-13.144 v1(48.718,-13.158) ; v1(49.875,-13.172) D13.1 ; D11.1 v1(54.165,-13.144) ; v1(55.337,-13.138) D10.1 ; C5.1 63.338,51.689 63.258,51.769 63.258,52.378 63.002,52.634 63.002,54.346 63.436,54.78 v1(63.436,54.8) 63.614,54.8 64.163,54.252 D6.1 ; v1(66.421,54.864) 66.436,54.849 66.436,54.71 66.83,54.315 D7.1
H5V: D3.1 HDMIOUT1.18 R5.1 R7.1 | length 6.7
  Top Layer w0.178: v1(58.463,18.255) 58.927,17.792 HDMIOUT1.18
  Bottom Layer w0.178: v1(58.463,18.255) 58.463,18.415 R7.1 R5.1
HCEC: H2.39 R1.1 | length 48.5
  Top Layer w0.178: H2.39 28.759,-1.975 30.797,0.064 30.797,6.858 44.107,20.168 59.398,20.168 R1.1
HDCEC: HDMIOUT1.13 R1.2 R2.2 | length 3.3
  Top Layer w0.178: R1.2 v1(61.132,20.257) 61.863,20.257 61.899,20.292 HDMIOUT1.13
  Bottom Layer w0.178: R2.2 v1(61.132,20.257)
HDHPD: HDMIOUT1.19 R3.2 | length 2.6
  Top Layer w0.178: R3.2 60.421,17.291 HDMIOUT1.19
HDMI_0N: D2.2 D2.9 H2.30 HDMIOUT1.9 | length 56.2
  Top Layer w0.178: H2.30 20.186,1.875 20.521,1.541 20.521,1.535 21.866,0.19 25.368,0.19 28.003,2.825 28.003,6.858 43.759,22.614 D2.2 D2.9 61.597,22.614 61.918,22.292 HDMIOUT1.9
HDMI_0P: D2.1 D2.10 H2.32 HDMIOUT1.7 | length 56.2
  Top Layer w0.178: H2.32 20.986,1.875 21.32,1.541 21.32,1.535 22.361,0.495 25.242,0.495 27.699,2.951 27.699,3.187 27.699,3.21 27.699,4.115 ccw(c27.521,4.115) 27.521,4.293 27.275,4.293 cw(c27.275,4.47) 27.275,4.648 27.521,4.648 ccw(c27.521,4.826) 27.699,4.826 27.699,5.271 27.699,6.984 43.828,23.114 D2.10 61.72,23.114 61.899,23.293 HDMIOUT1.7
HDMI_1N: D1.5 D1.6 H2.34 HDMIOUT1.6 | length 55.1
  Top Layer w0.178: H2.34 21.786,1.875 22.121,1.541 22.121,1.535 22.857,0.799 25.116,0.799 26.594,2.277 26.594,6.858 43.818,24.082 D1.6 61.629,24.082 61.918,23.793 HDMIOUT1.6
HDMI_1P: D1.4 D1.7 H2.36 HDMIOUT1.4 | length 55
  Top Layer w0.178: H2.36 22.586,1.875 22.921,1.541 22.921,1.535 23.352,1.104 24.989,1.104 26.289,2.404 26.289,3.785 26.249,3.825 ccw(c26.111,3.937) 26.289,3.937 26.289,4.826 26.289,4.915 ccw(c26.111,4.915) 26.111,5.093 25.893,5.093 cw(c25.893,5.271) 25.893,5.448 26.111,5.448 ccw(c26.111,5.626) 26.289,5.626 26.289,6.223 26.289,6.984 43.887,24.582 D1.7 61.539,24.582 61.736,24.779 62.979,24.779 HDMIOUT1.4
HDMI_2N: D1.2 D1.9 H2.38 HDMIOUT1.3 | length 53.7
  Top Layer w0.178: H2.38 23.386,1.875 23.721,1.541 23.721,1.535 23.847,1.409 24.526,1.409 25.209,2.093 25.209,6.845 43.948,25.583 D1.2 D1.9 61.646,25.583 61.777,25.452 ; 61.778,25.452 61.937,25.293 HDMIOUT1.3
HDMI_2P: D1.1 D1.10 H2.40 HDMIOUT1.1 | length 53.6
  Top Layer w0.178: H2.40 24.186,2.584 24.347,2.423 24.648,2.423 24.765,2.54 24.765,4.381 24.765,4.915 ccw(c24.587,4.915) 24.587,5.092 23.733,5.092 cw(c23.733,5.27) 23.733,5.448 24.587,5.448 ccw(c24.587,5.626) 24.765,5.626 24.765,6.07 24.765,6.858 43.99,26.083 D1.10 61.689,26.083 61.899,26.293 HDMIOUT1.1
HDMI_CN: D2.5 D2.6 H2.26 HDMIOUT1.12 | length 58.6
  Top Layer w0.178: H2.26 18.586,1.875 18.921,1.541 18.921,1.535 21.002,-0.546 27.225,-0.546 29.515,1.744 29.515,7.098 43.518,21.101 D2.5@59.258,21.101 ; D2.5@59.27,21.112 D2.6 61.598,21.112 61.918,20.792 HDMIOUT1.12
HDMI_CP: D2.4 D2.7 H2.28 HDMIOUT1.10 | length 58.6
  Top Layer w0.178: H2.28 19.386,1.875 19.721,1.541 19.721,1.535 21.497,-0.241 27.099,-0.241 29.21,1.87 29.21,2.095 29.21,3.327 ccw(c29.032,3.327) 29.032,3.505 28.786,3.505 cw(c28.786,3.683) 28.786,3.861 29.032,3.861 ccw(c29.032,4.038) 29.21,4.038 29.21,4.483 29.21,7.224 43.599,21.613 D2.7 61.719,21.613 61.899,21.792 HDMIOUT1.10
HDSCL: HDMIOUT1.15 R4.2 R5.2 | length 3.4
  Top Layer w0.178: R4.2 60.413,19.292 v1(61.151,19.292) HDMIOUT1.15
  Bottom Layer w0.178: R5.2 60.453,19.292 v1(61.151,19.292)
HDSDA: HDMIOUT1.16 R6.2 R7.2 | length 3.6
  Top Layer w0.178: R6.2 v1(61.214,18.415) 61.591,18.792 HDMIOUT1.16
  Bottom Layer w0.178: R7.2 v1(61.214,18.415)
HHPD: H2.37 R3.1 | length 48.6
  Top Layer w0.178: H2.37 23.386,-2.925 23.721,-3.259 23.721,-3.265 23.885,-3.429 28.003,-3.429 32.131,0.699 32.131,1.841 33.02,2.73 34.353,2.73 37.084,5.461 37.084,9.08 45.276,17.272 R3.1
HSCL: H2.24 R4.1 | length 56.7
  Top Layer w0.178: H2.24 17.786,1.327 v1(18.256,0.857) ; v1(33.401,4.483) 33.947,4.483 35.687,6.223 35.687,10.096 44.869,19.278 59.122,19.278 59.148,19.304 R4.1
  Bottom Layer w0.178: v1(18.256,0.857) 18.256,0.286 20.257,-1.714 23.05,-1.714 24.526,-0.239 24.526,1.409 27.6,4.483 v1(33.401,4.483)
HSDA: H2.22 R6.1 | length 58.3
  Top Layer w0.178: H2.22 16.986,0.996 v1(17.691,0.292) ; v1(33.401,3.683) 34.278,3.683 36.253,5.657 36.253,9.531 45.421,18.699 58.647,18.699 58.741,18.606 59.326,18.606 59.487,18.444 R6.1
  Bottom Layer w0.178: v1(17.691,0.292) 17.691,-0.279 19.926,-2.514 23.05,-2.514 25.326,-0.239 25.326,1.409 27.6,3.683 v1(33.401,3.683)
LL: C4.1 H2.11 R8.2 | length 82.7
  Top Layer w0.254: H2.11 v1(12.986,0.762) ; v1(12.986,9.588) 16.072,12.674 23.812,12.674 41.707,30.569 44.972,30.569 45.714,31.311 45.714,37.985 53.401,45.672 cw(c54.737,45.148) 54.214,46.485 60.409,52.68 v1(60.77,53.041)
  Bottom Layer w0.254: v1(12.986,0.762) v1(12.986,9.588) ; v1(60.77,53.041) C4.1@61.05,53.041 ; C4.1 61.138,52.998 R8.2
LR: C6.1 H2.13 R9.2 | length 87.2
  Top Layer w0.254: H2.13 v1(13.786,0.762) ; v1(13.786,9.588) 16.072,11.874 23.812,11.874 41.707,29.769 45.303,29.769 46.28,30.746 46.28,37.644 53.609,44.973 53.683,45.047 53.683,45.148 cw(c54.737,45.148) 54.737,46.202 54.838,46.203 54.913,46.277 60.515,51.88 66.434,51.88 v1(66.561,52.006)
  Bottom Layer w0.178: C6.1@66.561,52.935 C6.1
  Bottom Layer w0.254: v1(13.786,0.762) v1(13.786,9.588) ; v1(66.561,52.006) C6.1@66.561,52.935
NetAUDIO1_2: AUDIO1.2 AUDIO1.5 C4.2 D5.2 | length 6.3
  Bottom Layer w0.178: AUDIO1.5 62.271,53.217 C4.2 62.14,52.606 62.244,52.502 62.392,52.502 62.674,52.219 62.674,51.507 63.051,51.131 63.373,51.131 63.868,50.635 AUDIO1.2
NetAUDIO1_3: AUDIO1.3 AUDIO1.6 C6.2 D6.2 | length 8.2
  Bottom Layer w0.178: AUDIO1.3 64.996,55.209 D6.2 64.996,53.46 65.433,53.023 C6.2 65.683,53.023 66.038,53.377 66.038,53.382 66.383,53.728 66.914,53.728 67.501,53.141 67.501,52.163 67.031,51.693 67.031,50.922 66.743,50.635 AUDIO1.6
NetC1_2: C1.2 CN1.4 | length 2
  Bottom Layer w0.178: C1.2 52.806,40.069 CN1.4
NetC2_2: C2.2 CN1.5 | length 2
  Bottom Layer w0.178: CN1.5 C2.2
NetC3_2: C3.2 R8.1 | length 1
  Bottom Layer w0.178: R8.1 62.052,51.015 C3.2
NetC5_2: C5.2 R9.1 | length 1.2
  Bottom Layer w0.178: C5.2 64.678,51.689 64.996,52.006 R9.1
NetD4_1: D4.1 R2.1 | length 1.2
  Bottom Layer w0.178: D4.1 59.423,20.193 R2.1
NetD8_1: D8.1 R11.1 R12.2 | length 1.9
  Top Layer w0.178: R12.2 D8.1 33.363,-9.805 R11.1
NetR15_2: R15.2 R16.2 SIM1.11 | length 8.1
  Top Layer w0.178: v1(53.15,-12.078) 56.044,-9.183 SIM1.11
  Bottom Layer w0.178: R16.2 v1(53.15,-12.078)
PH0: H1.18 JP1.18 | length 23.5
  Top Layer w0.178: H1.18@17.85,38.577 v1(17.85,40.647)
  Bottom Layer w0.178: v1(17.85,40.647) 17.85,45.416 21.695,49.261 27.964,49.261 30.71,52.006 JP1.18
PH1: H1.19 JP1.19 | length 22.2
  Top Layer w0.178: H1.19 16.986,46.831 18.301,48.146 26.939,48.146 30.353,51.559 30.353,53.467 JP1.19
PH2: H1.4 JP1.4 | length 36.2
  Top Layer w0.178: H1.4@23.438,38.577 v1(23.438,40.647)
  Bottom Layer w0.178: v1(23.438,40.647) 23.438,46.174 24.382,47.117 44.704,47.117 JP1.4
PH3: H1.1 JP1.1 | length 37.3
  Top Layer w0.178: H1.1 24.186,45.204 24.384,45.402 47.816,45.402 53.149,50.736 53.149,52.427 52.133,53.443 JP1.1
PH4: H1.6 JP1.6 | length 34.6
  Top Layer w0.178: H1.6@22.613,38.577 v1(22.613,40.647)
  Bottom Layer w0.178: v1(22.613,40.647) 22.613,46.108 23.937,47.432 42.726,47.432 44.916,49.621 44.916,49.869 JP1.6
PH5: H1.14 JP1.14 | length 27.5
  Top Layer w0.178: H1.14@19.374,38.577 v1(19.374,40.647)
  Bottom Layer w0.178: v1(19.374,40.647) 19.374,46.078 21.948,48.651 33.538,48.651 JP1.14
PH6: H1.3 JP1.3 | length 35.1
  Top Layer w0.178: H1.3 23.386,45.23 23.863,45.707 44.731,45.707 50.663,51.639 50.663,52.374 49.593,53.443 JP1.3
PH7: H1.17 JP1.17 | length 24.2
  Top Layer w0.178: H1.17 17.786,46.869 18.758,47.841 29.495,47.841 32.893,51.239 32.893,53.467 JP1.17
PH8: H1.20 JP1.20 | length 21.6
  Top Layer w0.178: H1.20@17.025,38.577 v1(17.025,40.647)
  Bottom Layer w0.178: v1(17.025,40.647) 17.025,45.021 21.569,49.565 25.943,49.565 28.131,51.753 29.02,51.753 JP1.20
PH9: H1.13 JP1.13 | length 27.2
  Top Layer w0.178: H1.13 19.386,46.228 20.389,47.231 33.645,47.231 38.133,51.719 38.133,53.307 JP1.13
PH10: H1.15 JP1.15 | length 26.3
  Top Layer w0.178: H1.15 18.586,46.758 19.364,47.536 32.497,47.536 35.433,50.472 35.433,53.467 JP1.15
PI0: H1.23 JP1.23 | length 16.9
  Top Layer w0.178: H1.23 15.386,47.263 16.916,48.793 20.398,48.793 22.974,51.37 22.974,53.327 JP1.23
PI1: H1.9 JP1.9 | length 31
  Top Layer w0.178: H1.9 20.986,46.005 21.603,46.622 39.256,46.622 42.989,50.355 42.989,52.427 41.974,53.443 JP1.9
PI2: H1.22 JP1.22 | length 19.6
  Top Layer w0.178: H1.22@16.199,38.577 v1(16.199,40.647)
  Bottom Layer w0.178: v1(16.199,40.647) 16.199,44.627 21.443,49.87 24.597,49.87 JP1.22
PI3: H1.12 JP1.12 | length 29.4
  Top Layer w0.178: H1.12@20.2,38.577 v1(20.2,40.647)
  Bottom Layer w0.178: v1(20.2,40.647) 20.2,46.472 22.074,48.346 35.773,48.346 JP1.12
PI4: H1.30 JP1.30 | length 14.9
  Top Layer w0.178: H1.30@12.961,38.577 v1(12.961,40.647)
  Bottom Layer w0.178: v1(12.961,40.647) 12.961,48.394 JP1.30
PI5: H1.31 JP1.31 | length 12.8
  Top Layer w0.178: H1.31 12.186,46.539 15.113,49.466 15.113,53.467 JP1.31
PI6: H1.29 JP1.29 | length 13.5
  Top Layer w0.178: H1.29 12.986,46.893 17.653,51.559 17.653,53.467 JP1.29
PI7: H1.28 JP1.28 | length 16
  Top Layer w0.178: H1.28 v1(13.786,40.647)
  Bottom Layer w0.178: v1(13.786,40.647) 13.786,47.364 15.972,49.549 16.656,49.549 JP1.28
PI8: H1.5 JP1.5 | length 34.3
  Top Layer w0.178: H1.5 22.586,45.763 22.835,46.012 43.663,46.012 48.069,50.419 48.069,52.427 47.053,53.443 JP1.5
PI9: H1.10 JP1.10 | length 30.5
  Top Layer w0.178: H1.10@21.025,38.577 v1(21.025,40.647)
  Bottom Layer w0.178: v1(21.025,40.647) 21.025,45.396 23.671,48.041 38.008,48.041 JP1.10
PI10: H1.38 JP1.38 | length 14.8
  Top Layer w0.178: H1.38 v1(9.786,40.647)
  Bottom Layer w0.178: JP1.38 9.786,48.634 v1(9.786,40.647)
PI11: H1.33 JP1.33 | length 12.1
  Top Layer w0.178: H1.33 11.386,46.375 12.573,47.561 12.573,53.467 JP1.33
PI12: H1.34 JP1.34 | length 13.5
  Top Layer w0.178: H1.34@11.437,38.577 v1(11.437,40.647)
  Bottom Layer w0.178: v1(11.437,40.647) 11.465,40.675 11.465,51.978 JP1.34
PI13: H1.8 JP1.8 | length 32.5
  Top Layer w0.178: H1.8@21.851,38.577 v1(21.851,40.647)
  Bottom Layer w0.178: v1(21.851,40.647) 21.851,45.79 23.797,47.737 40.244,47.737 JP1.8
PI14: H1.25 JP1.25 | length 17.2
  Top Layer w0.178: H1.25 14.586,47.225 16.459,49.098 20.272,49.098 22.669,51.496 22.669,53.531 JP1.25
PI15: H1.36 JP1.36 | length 14.1
  Top Layer w0.178: H1.36@10.611,38.577 v1(10.611,40.647)
  Bottom Layer w0.178: JP1.36 10.611,50.349 v1(10.611,40.647)
PI16: H1.26 JP1.26 | length 16.3
  Top Layer w0.178: H1.26@14.612,38.577 v1(14.612,40.647)
  Bottom Layer w0.178: v1(14.612,40.647) 14.612,44.968 20.469,50.825 20.472,50.825 JP1.26
SDC0_CLK: D12.2 H2.19 SIM1.5 | length 45.8
  Top Layer w0.178: v1(16.192,-3.302) H2.19@16.192,-1.956
  Bottom Layer w0.178: v1(16.192,-3.302) 17.869,-4.978 45.998,-4.978 49.733,-8.713 49.733,-10.681 50.597,-11.544 52.185,-11.544 52.561,-11.921 52.561,-13.537 52.093,-14.006 D12.2 v1(52.07,-15.05)
SDC0_CMD: D11.2 H2.23 SIM1.3 | length 46.9
  Top Layer w0.178: v1(17.78,-3.302) H2.23@17.78,-1.956
  Bottom Layer w0.178: v1(17.78,-3.302) 18.847,-4.369 46.251,-4.369 50.343,-8.461 50.343,-10.351 50.926,-10.935 52.184,-10.935 52.578,-10.541 53.577,-10.541 54.657,-11.62 54.657,-13.537 54.188,-14.006 D11.2 v1(54.165,-15.176)
SDC0_D0: D13.2 H2.17 SIM1.7 | length 44.7
  Top Layer w0.178: v1(15.367,-3.302) H2.17@15.367,-1.956
  Bottom Layer w0.178: v1(15.367,-3.302) 17.348,-5.283 45.872,-5.283 49.428,-8.839 49.428,-10.807 50.402,-11.781 50.402,-13.537 49.934,-14.006 D13.2 ; v1(49.784,-15.176) D13.2@49.784,-14.006
SDC0_D1: D14.2 H2.15 SIM1.8 | length 44.9
  Top Layer w0.178: H2.15@14.541,-1.956 14.583,-1.998 14.583,-3.299 v1(14.58,-3.302) ; v1(48.704,-15.253) SIM1.8@48.714,-15.243
  Bottom Layer w0.178: v1(14.58,-3.302) 14.58,-3.34 16.828,-5.588 45.746,-5.588 49.124,-8.966 49.124,-11.184 49.259,-11.319 49.259,-13.537 48.791,-14.006 D14.2 48.704,-14.069 v1(48.704,-15.253)
SDC0_D2: D9.2 H2.27 SIM1.1 | length 47.6
  Top Layer w0.178: v1(19.386,-3.321) H2.27
  Bottom Layer w0.178: v1(19.386,-3.321) 19.825,-3.759 46.503,-3.759 50.952,-8.208 50.952,-10.099 51.141,-10.287 51.689,-10.287 52.133,-9.842 54.927,-9.842 57.023,-11.938 57.023,-13.742 56.414,-14.351 v1(56.414,-15.243)
SDC0_D3: D10.2 H2.25 SIM1.2 | length 47.1
  Top Layer w0.178: v1(18.605,-3.302) H2.25@18.605,-1.956
  Bottom Layer w0.178: v1(18.605,-3.302) 19.367,-4.064 46.377,-4.064 50.648,-8.334 50.648,-10.225 51.053,-10.63 51.918,-10.63 52.387,-10.16 54.212,-10.16 55.863,-11.811 55.863,-13.537 55.395,-14.006 D10.2 v1(55.372,-15.05)
SDC0_DET: H2.21 R15.1 | length 42
  Top Layer w0.178: v1(16.954,-3.302) H2.21@16.954,-1.956
  Bottom Layer w0.178: v1(16.954,-3.302) 18.326,-4.674 46.125,-4.674 50.038,-8.587 50.038,-10.477 50.8,-11.239 53.073,-11.239 R15.1
TV_OUT: AUDIO1.4 AUDIO1.7 D7.2 H2.9 R10.2 | length 94.8
  Top Layer w0.254: H2.9 v1(12.186,0.762) ; v1(12.186,9.588) 16.072,13.474 23.812,13.474 41.707,31.369 44.64,31.369 45.148,31.877 45.148,38.172 61.144,54.167 61.544,54.167 61.582,54.206 64.164,54.206 64.232,54.273 67.642,54.273 v1(67.661,54.293)
  Bottom Layer w0.178: AUDIO1.4 AUDIO1.4@67.663,55.392 ; R10.2 69.355,50.701 AUDIO1.7
  Bottom Layer w0.254: v1(12.186,0.762) v1(12.186,9.588) ; D7.2 AUDIO1.4@67.663,55.392 ; D7.2@67.703,54.251 v1(67.661,54.293) 67.661,54.271 69.355,52.578 R10.2
USB0_ID: D8.2 USB1.A5 USB1.B5 | length 12.5
  Top Layer w0.178: D8.2 34.963,-10.198 35.103,-10.338 35.933,-10.338 36.404,-10.809 39.847,-10.809 40.559,-10.096 ; USB1.A5 39.832,-8.689 39.832,-9.369 40.559,-10.096 ; USB1.B5 42.71,-8.689 42.71,-9.369 41.983,-10.096 40.559,-10.096
USB_ID: H2.2 R12.1 | length 33.6
  Top Layer w0.178: H2.2 8.986,1.875 7.81,0.699 7.81,-4.889 11.747,-8.826 R12.1
VBUS: D3.2 H1.37 H1.39 H2.7 H2.20 JP1.37 JP1.39 USB1.A4B9 USB1.B4A9 USB2.1 USB3.1 USB4.1 | length 224
  Top Layer w0.381: JP1.39 5.271,53.149 5.271,48.043 8.986,44.327 H1.39 ; JP1.37 7.836,53.124 7.836,47.79 9.786,45.84 H1.37 H1.39 ; v1(8.191,42.227) 8.332,42.368 8.927,42.368 8.986,42.427 H1.39 ; v1(11.303,0.127) 11.303,0.106 11.387,0.023 H2.7 11.387,-2.925 11.619,-3.158 11.619,-3.307 11.805,-3.493 11.938,-3.493 12.128,-3.683 13.779,-3.683 v1(14.795,-4.699) 14.859,-4.763 40.229,-4.763 43.238,-7.772 43.238,-7.945 43.472,-8.179 USB1.B4A9 43.472,-9.078 43.238,-9.312 43.238,-9.53 v1(42.481,-10.287) ; H2.20 16.186,0.281 16.319,0.148 v1(16.319,0.127) ; USB1.A4B9 38.655,-8.713 38.655,-9.445 v1(39.37,-10.16) ; v1(56.07,12.89) 59.36,9.601 USB3.1 66.04,5.557 66.04,-0.475 ; USB4.1 61.933,-7.598 63.104,-6.426 64.595,-6.426 66.04,-4.981 66.04,-0.475 ; USB2.1 62.975,-0.699 65.817,-0.699 66.04,-0.475
  Bottom Layer w0.381: v1(8.191,42.227) 8.191,0.953 9.017,0.127 v1(11.303,0.127) 11.303,10.858 12.383,11.938 55.847,11.938 56.07,12.161 v1(56.07,12.89) 56.07,18.378 56.107,18.415 D3.2 ; v1(14.795,-4.699) 14.034,-3.937 14.034,-2.159 v1(16.319,0.127) ; v1(39.37,-10.16) 42.355,-10.16 v1(42.481,-10.287)
pads on no net: CN1.0 CN1.7 CN1.9 CN1.10 CN1.11 CN1.12 CN1.13 CN1.14 H1. H2. HDMIOUT1.14 USB1.A8 USB1.B8

## Polygon pours and split planes (outlines as drawn)
GND on Bottom Layer "GND_L04_P000" (solid, remove dead copper, pour order 0): -10.668,60.134 -12.383,58.42 -12.383,-23.876 76.073,-23.876 83.947,-16.002 83.947,60.198
GND on Top Layer "GND_L01_P001" (solid, remove dead copper, pour order 1): -10.668,60.134 -12.383,58.42 -12.383,-23.876 76.073,-23.876 83.947,-16.002 83.947,60.198
VBUS on Layer 2 (split plane): 73.912,-16 -6.665,-16 -6.665,55.941 73.912,55.941
GND on Layer 1 (split plane): 73.912,-16 -6.665,-16 -6.665,55.941 73.912,55.941

## Other copper
Top Layer:
  pour cut-out: 6.985,51.498 10.858,47.625 42.813,47.625 44.782,45.657 48.006,45.657 52.705,50.355 52.705,52.07 6.604,52.07 6.413,52.261
  pour cut-out: 45.339,32.575 43.497,30.734 41.402,30.734 41.402,30.543 23.533,12.674 15.937,12.674 12.89,9.628 12.89,5.651 12.319,5.651 7.81,1.143 7.81,-4.889 11.747,-8.826 12.763,-7.81 33.655,-7.81 34.671,-8.826 35.052,-8.445 35.433,-8.445 35.433,-6.096 35.623,-5.905 34.989,-5.271 28.892,-5.271 28.892,1.079 47.561,19.748 47.561,31.686 48.387,32.512 48.387,36.449 51.435,36.449 53.149,38.163 53.023,38.291 53.023,45.847 45.72,38.544 45.72,33.401
Bottom Layer:
  pour cut-out: 8.319,13.525 8.382,13.462 8.382,0.826 8.445,0.826 9.271,0 9.716,0.445 14.034,0.445 14.351,0.762 15.24,-0.127 23.114,-0.127 23.114,1.587 29.972,8.445 58.864,8.445 59.055,8.255 60.325,9.525 60.325,19.494 55.816,19.494 54.927,18.605 54.927,13.685 12.542,13.685 12.383,13.525
  pour cut-out: 7.683,50.736 12.192,46.228 12.192,43.878 21.273,43.878 24.066,46.672 46.799,46.672 50.863,50.736 7.836,50.736
  pour cut-out: 15.389,1.335 13.786,-0.268 13.786,-2.801 15.367,-4.381 26.098,-4.381 26.098,-0.583 25.326,0.19 22.913,-2.222 21.627,-2.222 18.093,1.312
  pour cut-out: 18.821,10.042 19.431,9.433 19.431,0 20.701,0 21.78,-1.079 22.543,-0.318 22.543,8.636 22.098,9.08
  pour cut-out: 22.568,7.328 22.555,7.328 21.78,6.554 21.78,6.159 47.816,6.159 59.292,-5.317 59.292,-1.795 59.436,-1.651 49.022,8.763 23.114,8.763 22.733,8.382

## Silkscreen, mask and mechanical layers (free items; w line width, h text height)
Top Silkscreen Layer:
  text "G    PI13" at 44.196,50.355 h0.64 r270
  text "PI8  PH4" at 46.736,50.355 h0.64 r270
  text "PH6  PH2" at 49.276,50.355 h0.64 r270
  text "PH3  G" at 51.816,50.355 h0.64 r270
  text "5V   3V3" at 3.429,50.228 h0.64 r270
  text "5V   PI10" at 5.969,50.228 h0.64 r270
  text "GND  PI15" at 8.509,50.228 h0.64 r270
  text "PI11 PI12" at 11.049,50.228 h0.64 r270
  text "PI5  G" at 13.589,50.228 h0.64 r270
  text "PI6  PI4" at 16.129,50.228 h0.64 r270
  text "G    PI7" at 18.669,50.228 h0.64 r270
  text "PI14 PI16" at 21.209,50.228 h0.64 r270
  text "PI0  3V3" at 23.749,50.228 h0.64 r270
  text "G    PI2" at 26.289,50.228 h0.64 r270
  text "PH1  PH8" at 28.829,50.228 h0.64 r270
  text "PH7  PH0" at 31.369,50.228 h0.64 r270
  text "PH10 G" at 33.909,50.228 h0.64 r270
  text "PH9  PH5" at 36.449,50.228 h0.64 r270
  text "G    PI3" at 38.989,50.228 h0.64 r270
  text "PI1  PI9" at 41.529,50.228 h0.64 r270
  text "Internet" at 50.863,33.782 h1.27 r90
  text "HDMI" at 57.81,20.422 h1.27 r90
  text "USB1" at 67.056,11.684 h1.27
  text "USB2" at 66.929,2.286 h1.27
  text "SD" at 52.197,-2.857 h1.27
  text "USB OTG" at 37.274,-6.604 h1.27
  text "USB3" at 66.675,-7.112 h1.27
Mechanical Layer:
  the board outline again, w0.254

## Text inside footprints (layer, text, board x,y; h text height)
C1: Bottom Silkscreen Layer "C12" at 50.895,39.478 h0.38 r180
C2: Bottom Silkscreen Layer "C12" at 61.119,41.865 h0.38
C3: Bottom Silkscreen Layer "C12" at 60.23,50.464 h0.38 r180
C4: Bottom Silkscreen Layer "C12" at 60.293,52.559 h0.38 r180
C5: Bottom Silkscreen Layer "C12" at 62.706,51.162 h0.38 r180
C6: Bottom Silkscreen Layer "C12" at 67.405,53.549 h0.38
CN1: Top Silkscreen Layer "Y" at 69.977,44.011 h0.38 r270; Top Silkscreen Layer "G" at 69.977,38.296 h0.38 r270
D1: Top Silkscreen Layer "D19" at 60.825,26.699 h0.38 r270
D2: Top Silkscreen Layer "D19" at 60.83,23.73 h0.38 r270
D3: Bottom Silkscreen Layer "D22" at 57.895,18.796 h0.38 r90
D4: Bottom Silkscreen Layer "D22" at 57.895,20.574 h0.38 r90
D5: Bottom Silkscreen Layer "D8" at 60.758,54.042 h0.38 r180
D6: Bottom Silkscreen Layer "D8" at 63.552,53.852 h0.38 r180
D7: Bottom Silkscreen Layer "D8" at 66.219,53.915 h0.38 r180
D8: Top Silkscreen Layer "D20" at 32.936,-8.261 h0.38
D9: Bottom Silkscreen Layer "D8" at 56.074,-12.562 h0.38 r90
D10: Bottom Silkscreen Layer "D8" at 54.995,-12.562 h0.38 r90
D11: Bottom Silkscreen Layer "D8" at 53.788,-12.562 h0.38 r90
D12: Bottom Silkscreen Layer "D8" at 51.693,-12.562 h0.38 r90
D13: Bottom Silkscreen Layer "D8" at 49.534,-12.562 h0.38 r90
D14: Bottom Silkscreen Layer "D8" at 48.391,-12.562 h0.38 r90
HDMIOUT1: Top Silkscreen Layer "HDMIOUT" at 61.691,13.665 h0.38 r90
JP1: Top Silkscreen Layer "39" at 2.095,55.054 h0.38 r180; Top Silkscreen Layer "40" at 2.095,52.514 h0.38 r180; Top Silkscreen Layer "2" at 54.673,52.514 h0.38 r180; Top Silkscreen Layer "1" at 54.419,55.054 h0.38 r180
R1: Top Silkscreen Layer "R6" at 58.847,20.882 h0.38
R2: Bottom Silkscreen Layer "R6" at 58.847,19.631 h0.38 r180
R3: Top Silkscreen Layer "R6" at 58.847,17.898 h0.38
R4: Top Silkscreen Layer "R6" at 58.847,19.93 h0.38
R5: Bottom Silkscreen Layer "R6" at 58.847,18.615 h0.38 r180
R7: Bottom Silkscreen Layer "R6" at 58.847,17.789 h0.38 r180
R8: Bottom Silkscreen Layer "R6" at 62.692,52.632 h0.38
R9: Bottom Silkscreen Layer "R6" at 65.007,51.381 h0.38 r180
R10: Bottom Silkscreen Layer "R6" at 67.801,51.19 h0.38 r180
R11: Top Silkscreen Layer "R6" at 33.858,-9.919 h0.38 r270
R12: Top Silkscreen Layer "R6" at 30.907,-8.201 h0.38
R15: Bottom Silkscreen Layer "R6" at 52.524,-10.524 h0.38 r90
R16: Bottom Silkscreen Layer "R6" at 53.775,-14.622 h0.38 r270